# Altium PCB ZD-STM32-ZOUYU.PcbDoc (part 3 of 8)
Units mm, origin at the board's own origin, x right, y up, seen from the top; angles counter-clockwise.
Board outline 251.84 x 139.06 mm, 2 copper layers (Top Layer, Bottom Layer); 254 components, 246 nets, 1172 pads, 599 vias.
Unrouted connection lines stored in the file: 9.
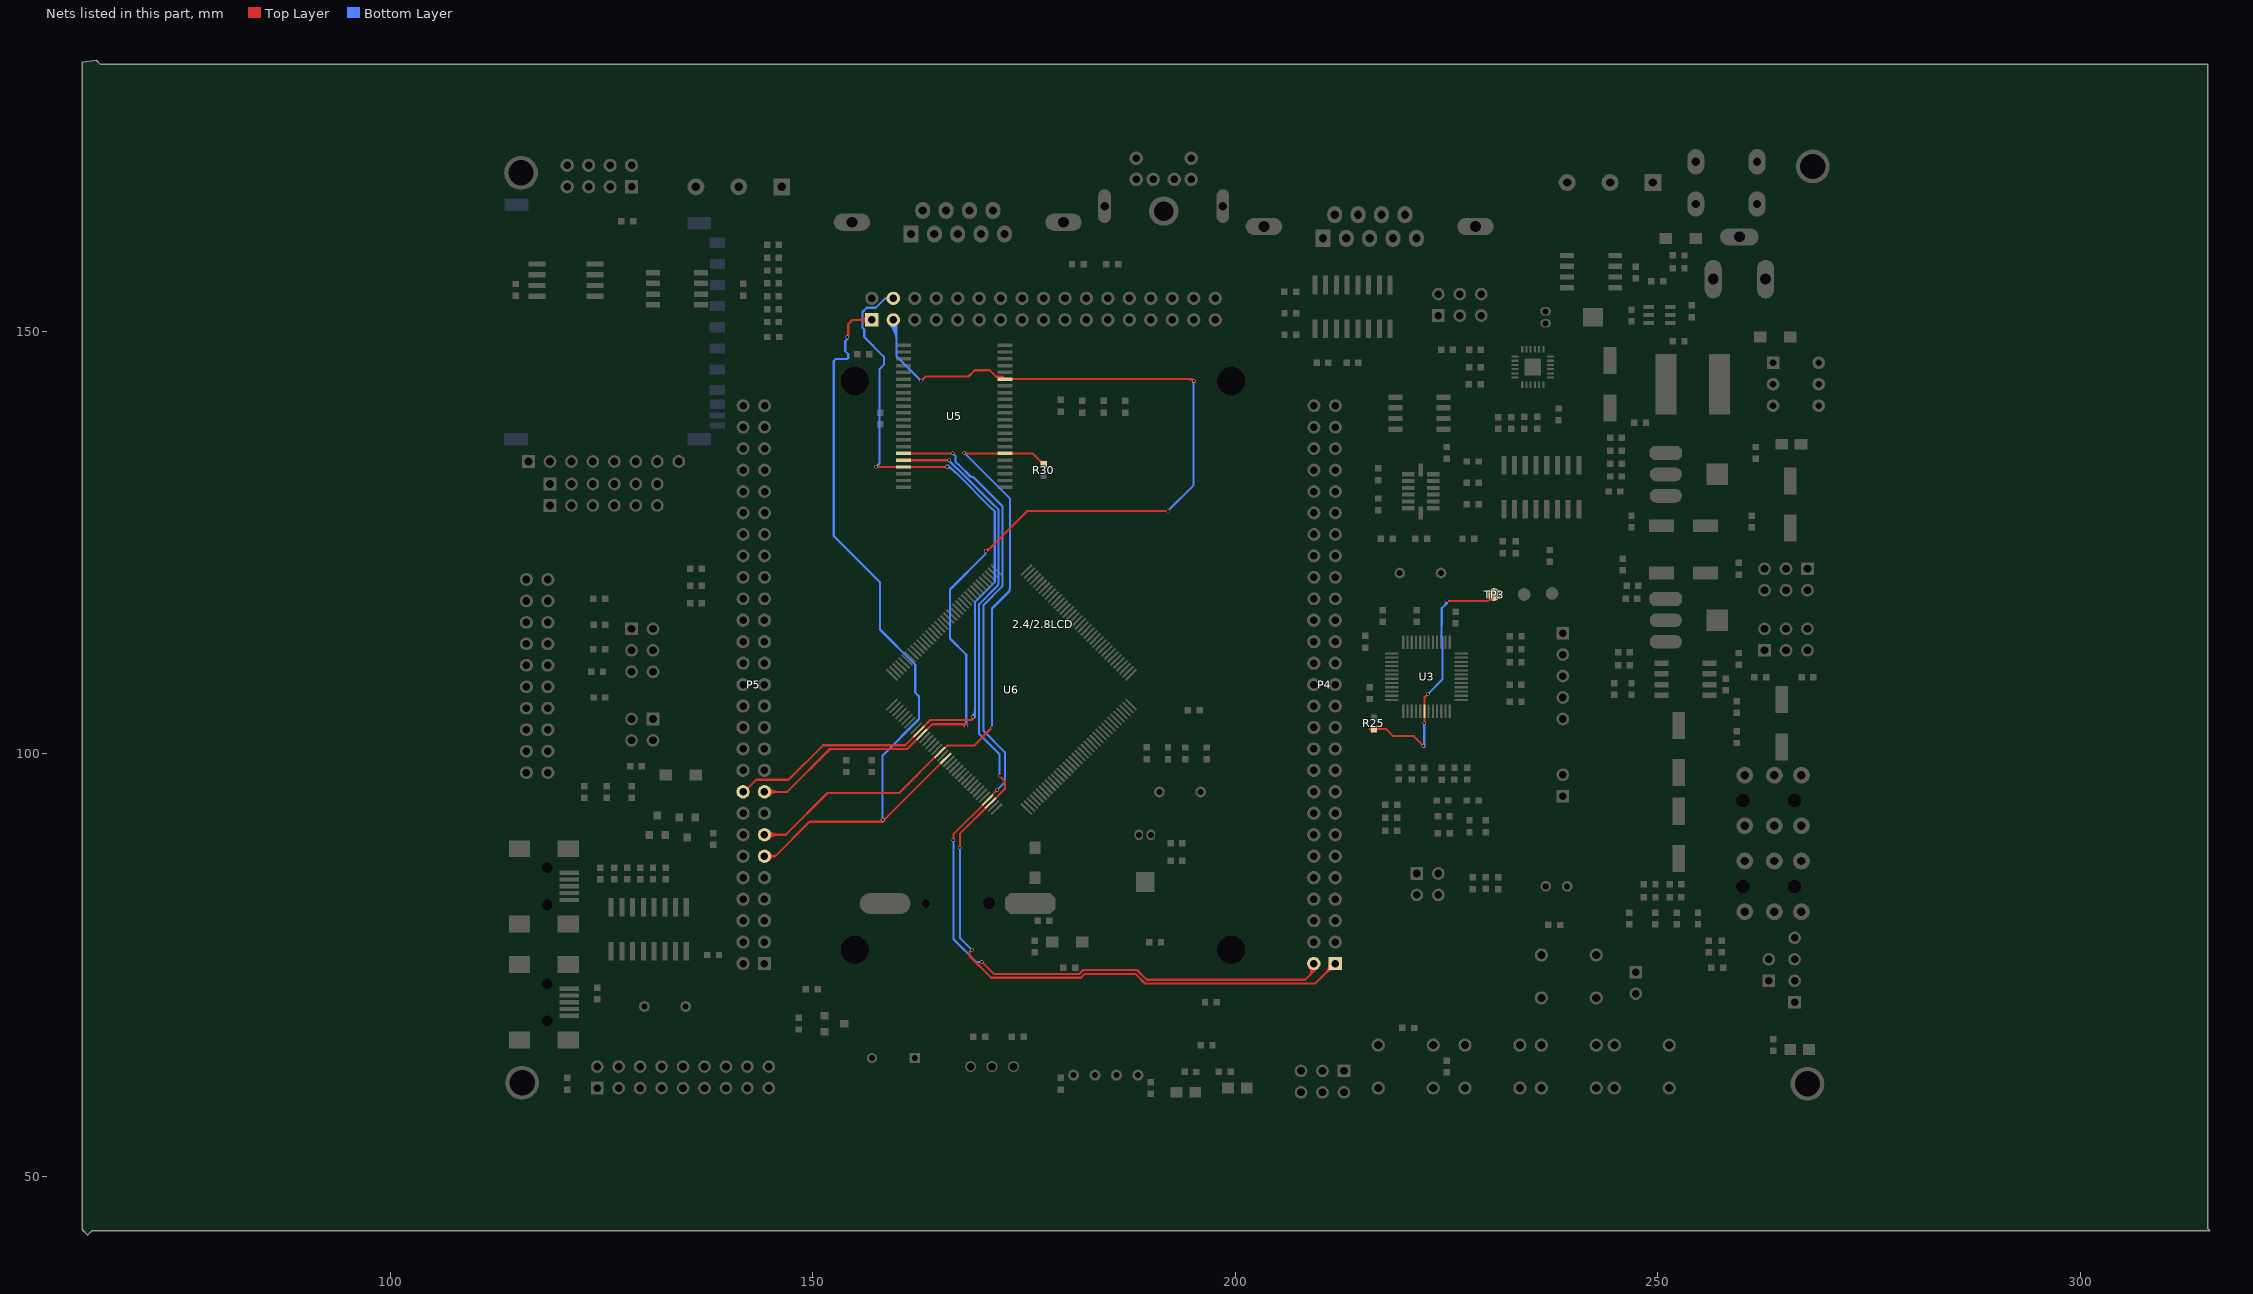
[diagram p3: the nets of this part, all layers, seen from the top]

## Via types
v1: diameter 0.4, hole 0.3, Top Layer to Bottom Layer, 598 vias
v2: diameter 0.3, hole 0.2, Top Layer to Bottom Layer, 1 vias

## Nets (pads, with @x,y where several pads share a name; then routed paths per layer and width w, separated by ;. In a path a pad name is that pad's centre, name@x,y a point inside that pad or via, vN(x,y) a via of type N, cw(c..) or ccw(c..) an arc to the next point about the centre after c; other vN are vias at no path point) (continued)
"FSMC NBL0": P4.2 U5.39 U6.141 | length 122
  Top Layer w0.254: U5.39@160.729,135.571 v1(166.559,135.571) v1@166.624,135.636 ; v1(166.624,89.789) 166.624,90.48 U6.141@170.67,94.526 170.67,94.591 171.831,95.752 v1(171.831,95.758) ; v1@169.926,75.438 v1(169.978,75.386) 171.396,73.968 181.542,73.968 181.996,74.422 188.355,74.422 189.498,73.279 208.28,73.279 209.285,74.284 ; 208.735,73.734 ccw(c208.193,74.276) P4.2@208.78,74.77 ; 208.931,73.93 ccw(c208.406,74.455) P4.2@208.974,74.933 ; P4.2@209.08,74.567 cw(c208.988,74.284) 209.285,74.284 ; 209.127,74.126 ccw(c208.619,74.634) P4.2@209.169,75.097 ; P4.2@209.285,75.195 209.285,74.284 ; 209.323,74.322 ccw(c208.831,74.813) P4.2@209.363,75.26 ; P4.2@209.49,74.567 ccw(c209.583,74.284) 209.285,74.284
  Bottom Layer w0.254: v1(166.559,135.571) 166.883,135.247 166.883,134.553 167.192,134.244 167.258,134.244 168.714,132.788 168.971,132.788 172.431,129.328 172.431,119.959 172.358,119.886 172.358,119.773 170.18,117.595 170.18,102.753 172.72,100.213 172.72,96.647 v1(171.831,95.758) ; v1(166.624,89.789) 166.624,78.105 169.343,75.386 v1(169.978,75.386)
"FSMC NBL1": P4.1 U5.40 U6.142 | length 122.2
  Top Layer w0.254: U5.40@160.729,134.771 v1@166.116,134.771 ; 165.881,134.771 cw(c165.881,134.512) v1@166.064,134.695 ; v1(167.386,88.9) 167.386,90.535 U6.142@171.023,94.172 ; v1(168.783,76.835) 168.529,76.581 168.529,76.09 171.105,73.514 181.73,73.514 182.184,73.968 188.167,73.968 189.31,72.825 209.455,72.825 P4.1@211.825,75.195 ; U6.142@171.023,94.172 172.737,95.885 172.737,96.757 v1(172.085,97.409) ; P4.1@211.165,75.195 cw(c209.57,75.195) 210.698,74.067 cw(c211.825,72.94) P4.1@211.825,74.534 ; P4.1@211.419,75.195 cw(c210.438,75.195) 211.131,74.501 cw(c211.825,73.807) P4.1@211.825,74.788
  Bottom Layer w0.254: v1(166.116,134.747) 166.116,134.678 167.004,133.79 167.07,133.79 171.428,129.432 171.445,129.432 171.977,128.9 171.977,120.147 171.904,120.074 171.904,119.961 169.672,117.729 169.672,102.362 172.085,99.949 v1(172.085,97.409) ; v1@166.189,134.747 ccw(c166.531,134.747) 166.289,134.505 ; v1(167.386,88.9) 167.386,78.232 v1(168.783,76.835)
"FSMC NE3": P5.13 R30.1 U5.6 U6.125 | length 82.9
  Top Layer w0.254: P5.13@144.261,90.435 146.773,90.435 151.715,95.377 160.207,95.377 U6.125@165.013,100.183 165.078,100.183 165.878,100.983 169.055,100.983 v1(171.196,103.124) ; P5.13@144.549,90.147 cw(c145.242,89.454) 145.242,90.435 cw(c145.242,91.416) P5.13@144.549,90.722 ; P5.13@144.728,89.968 cw(c145.856,88.84) 145.856,90.435 cw(c145.856,92.029) P5.13@144.728,90.902 ; v1(167.894,135.636) 167.959,135.571 U5.6@172.729,135.571 176.01,135.571 R30.1@177.292,134.29 ; v1@167.946,135.688 ccw(c168.226,135.968) 168.226,135.571 ; R30.1@177.038,134.29 ccw(c176.425,134.29) 176.858,134.723 ccw(c177.292,135.157) R30.1@177.292,134.544
  Bottom Layer w0.254: v1(167.894,135.636) 173.339,130.191 173.339,119.583 173.266,119.51 173.266,119.284 171.196,117.214 171.196,103.378
"FSMC NE4": 2.4/2.8LCD.1 P5.11 U6.127 | length 104.1
  Top Layer w0.254: P5.11@144.261,87.895 145.517,87.895 ; P5.11@144.805,87.521 cw(c145.517,87.031) 145.517,87.895 ; P5.11@144.805,88.269 ccw(c145.517,88.759) 145.517,87.895 ; v1@153.999,149.404 ccw(c153.568,149.835) 154.178,149.835 ; v1(154.051,149.352) 154.178,149.479 154.178,150.876 154.686,151.384 2.4/2.8LCD.1@156.972,151.384 ; 2.4/2.8LCD.1@156.505,150.917 ccw(c155.378,149.79) 155.378,151.384 ccw(c155.378,152.978) 2.4/2.8LCD.1@156.505,151.851 ; 2.4/2.8LCD.1@156.685,151.097 ccw(c155.991,150.403) 155.991,151.384 ccw(c155.991,152.365) 2.4/2.8LCD.1@156.685,151.671 ; 157.498,91.967 ccw(c157.498,92.946) v1@158.19,92.254 ; 158.112,91.967 ccw(c158.112,92.332) v1@158.37,92.074 ; v1@158.242,92.275 ccw(c158.242,92.945) 158.716,92.471 ; U6.127@165.72,99.476 158.211,91.967 149.589,91.967 145.517,87.895
  Bottom Layer w0.254: 153.951,148.995 ccw(c153.767,149.179) v1@153.989,149.314 ; v1(154.051,149.352) 154.051,149.095 153.823,148.867 153.823,147.678 154.178,147.323 154.178,146.873 154.068,146.763 152.725,146.763 152.459,146.497 152.459,125.798 157.944,120.313 157.944,114.725 162.106,110.563 162.106,107.254 162.56,106.8 162.56,104.14 158.242,99.822 v1(158.242,92.202) 158.242,92.075 158.115,91.948
"FSMC NOE": 2.4/2.8LCD.4 P5.18 U5.41 U6.118 | length 100.9
  Top Layer w0.254: P5.18@141.721,95.515 141.864,95.515 143.29,96.94 147.105,96.94 151.203,101.038 160.918,101.038 U6.118@162.538,102.658 163.893,104.013 168.783,104.013 168.91,104.14 v1(168.91,104.394) ; v1(157.48,133.985) 157.494,133.971 U5.41@160.729,133.971 v1(165.876,133.971) v1@165.989,133.858 ; v1@157.532,134.037 ccw(c157.689,134.194) 157.689,133.971
  Bottom Layer w0.254: v1(157.48,133.985) 157.875,134.38 157.875,145.556 158.388,146.069 158.388,147.03 156.067,149.351 156.067,150.252 155.858,150.461 155.858,152.307 156.36,152.81 157.434,152.81 158.548,153.924 ; 2.4/2.8LCD.4@158.896,153.685 ccw(c158.548,153.551) 158.548,153.924 ; 2.4/2.8LCD.4@158.896,154.163 cw(c158.548,154.297) 158.548,153.924 ; 2.4/2.8LCD.4@159.512,153.924 158.548,153.924 ; v1@165.806,134.139 cw(c165.897,133.919) 166.065,134.087 ; v1@165.876,133.898 cw(c165.876,132.985) 166.522,133.631 ; v1(165.876,133.971) 166.181,133.971 166.816,133.336 166.882,133.336 171.24,128.978 171.257,128.978 171.523,128.712 171.523,120.335 169.164,117.976 169.164,104.394 v1@169.037,104.267 ; v1@165.876,134.152 cw(c165.876,133.852) 166.088,134.064 ; v1@165.904,133.904 cw(c166.055,133.54) 166.334,133.819 ; v1@168.858,104.446 ccw(c168.121,105.183) 169.164,105.183 ; v1@169.038,104.266 ccw(c168.734,104.57) 169.164,104.57
"FSMC NWE": 2.4/2.8LCD.3 P5.17 U5.17 U6.119 | length 145.2
  Top Layer w0.254: P5.17@144.261,95.515 146.95,95.515 152.019,100.584 161.172,100.584 U6.119@162.892,102.304 164.112,103.524 168.002,103.524 168.148,103.378 v1(168.148,103.251) ; P5.17@144.549,95.227 cw(c145.242,94.534) 145.242,95.515 cw(c145.242,96.496) P5.17@144.549,95.802 ; P5.17@144.728,95.048 cw(c145.856,93.92) 145.856,95.515 cw(c145.856,97.109) P5.17@144.728,95.982 ; v1(162.814,144.145) 163.341,144.672 168.404,144.672 169.147,145.415 170.923,145.415 171.694,144.644 172.456,144.644 U5.17@172.729,144.371 194.846,144.371 v1(195.053,144.164) 195.199,144.018 ; 167.313,103.524 cw(c167.313,102.416) v1@168.096,103.199 ; 167.926,103.524 cw(c167.926,103.029) v1@168.276,103.379 ; v1(170.434,124.079) 170.688,124.079 175.387,128.778 v1(192.024,128.778) v1@192.151,128.905 ; v1@170.434,124.152 ccw(c170.434,124.941) 170.992,124.383 ; 194.376,144.371 cw(c194.376,143.486) v1@195.002,144.112
  Bottom Layer w0.254: 2.4/2.8LCD.3@159.045,150.917 cw(c156.998,148.87) 159.893,148.87 ; 2.4/2.8LCD.3@159.225,151.097 cw(c157.611,149.483) 159.893,149.483 ; 2.4/2.8LCD.3@159.404,151.276 cw(c158.224,150.096) 159.893,150.096 ; 2.4/2.8LCD.3@159.512,151.384 159.893,151.003 159.893,147.066 v1(162.814,144.145) ; v1(168.148,103.251) 168.148,111.743 166.224,113.667 166.224,119.471 170.434,123.681 v1(170.434,124.079) ; v1(192.024,128.778) 195.053,131.807 v1(195.053,144.164)
GBUF: R25.2 TP3.1 U3.42 | length 35.3
  Top Layer w0.254: 215.898,102.933 217.868,102.933 218.694,102.108 221.107,102.108 v1(222.25,100.965) 222.377,100.838 v1@222.25,100.838 ; R25.2@216.078,102.754 cw(c216.512,102.32) 216.512,102.933 cw(c216.512,103.547) R25.2@216.078,103.113 ; v1(222.377,103.632) U3.42@222.377,105.046 222.377,106.68 v1(222.758,107.061) ; v1(225.044,118.11) 229.87,118.11 ; TP3.1@230.03,118.71 cw(c229.431,118.549) 229.87,118.11 ; TP3.1@230.47,118.27 ccw(c230.309,117.671) 229.87,118.11 ; TP3.1@230.632,118.872 229.87,118.11
  Bottom Layer w0.254: v1(222.25,100.965) 222.358,100.857 222.358,103.613 v1(222.377,103.632) ; v1@222.358,101.06 ccw(c222.599,101.06) v1@222.429,100.89 ; 222.358,103.41 cw(c222.599,103.41) v1@222.429,103.58 ; v1(222.758,107.061) 224.501,108.804 224.501,113.808 224.39,113.919 224.39,115.249 224.428,115.287 224.428,117.24 225.044,117.856 v1(225.044,118.11) ; 224.74,117.552 ccw(c224.182,118.11) v1@224.971,118.11